# EAGLE board cetak (EAGLE 7.6.0)
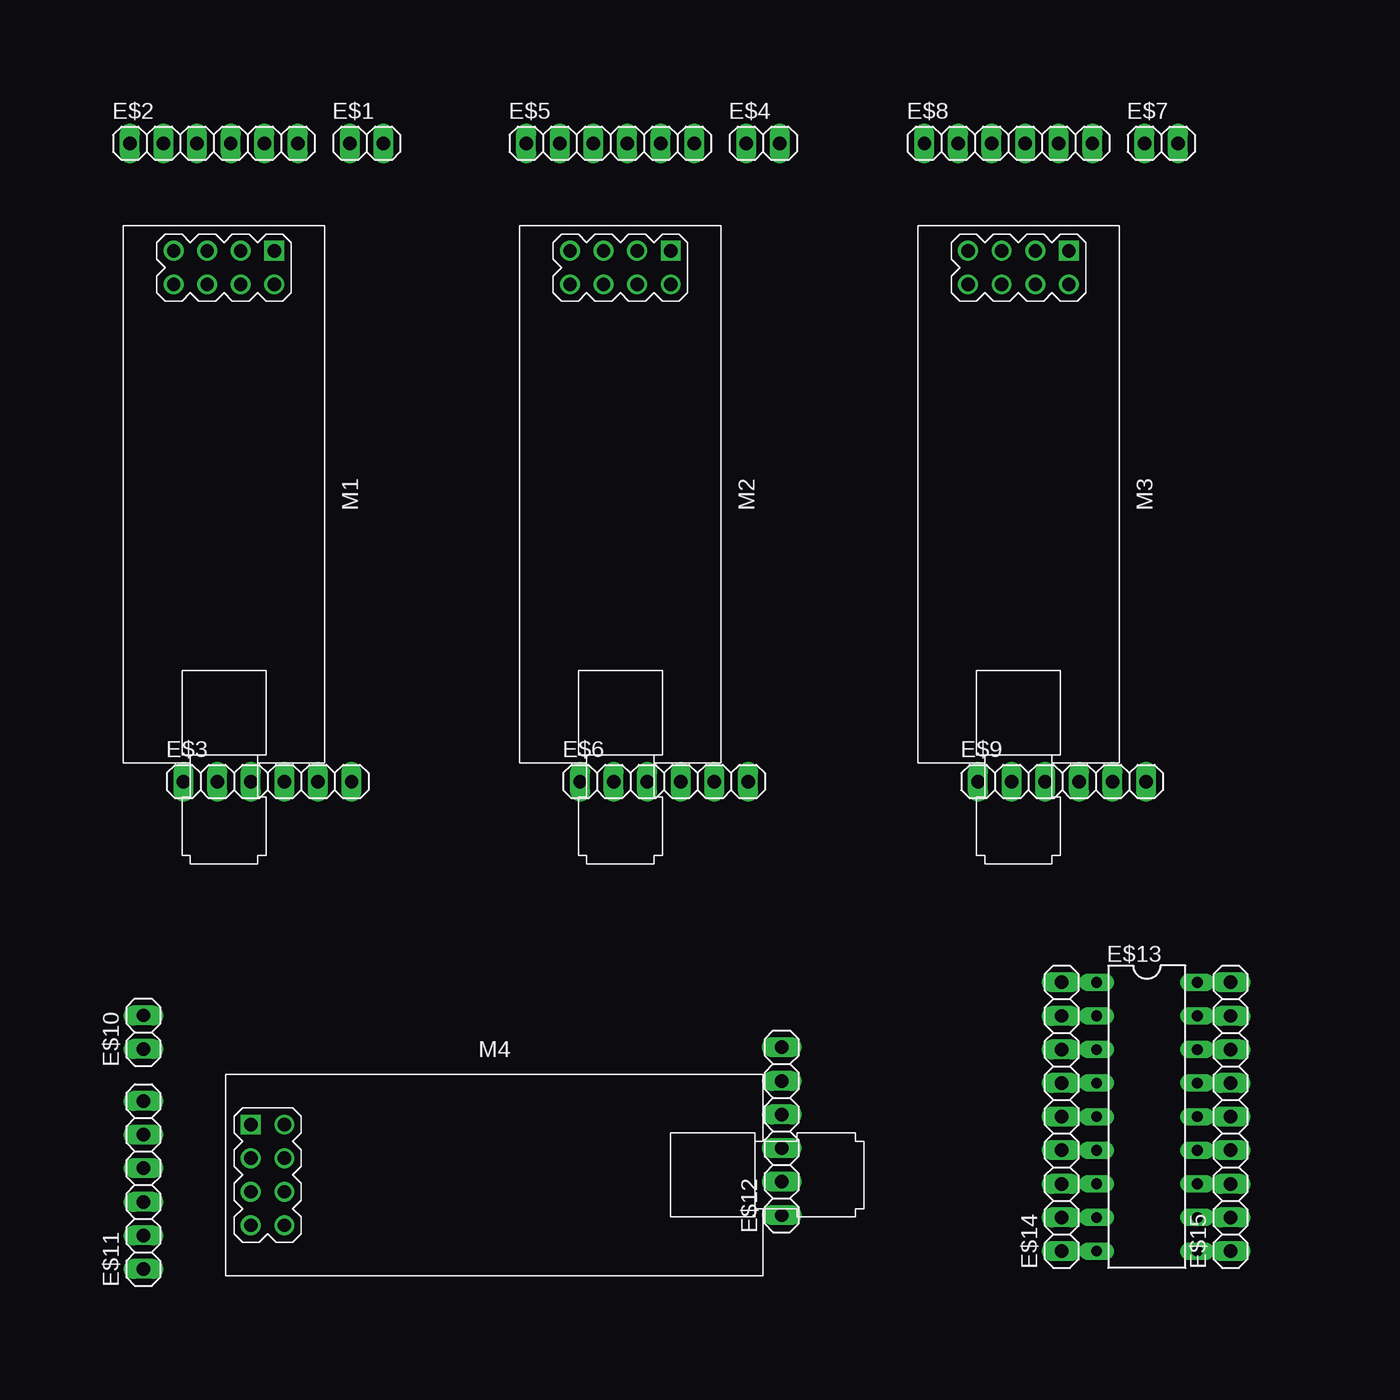
[diagram p0: board, top side]
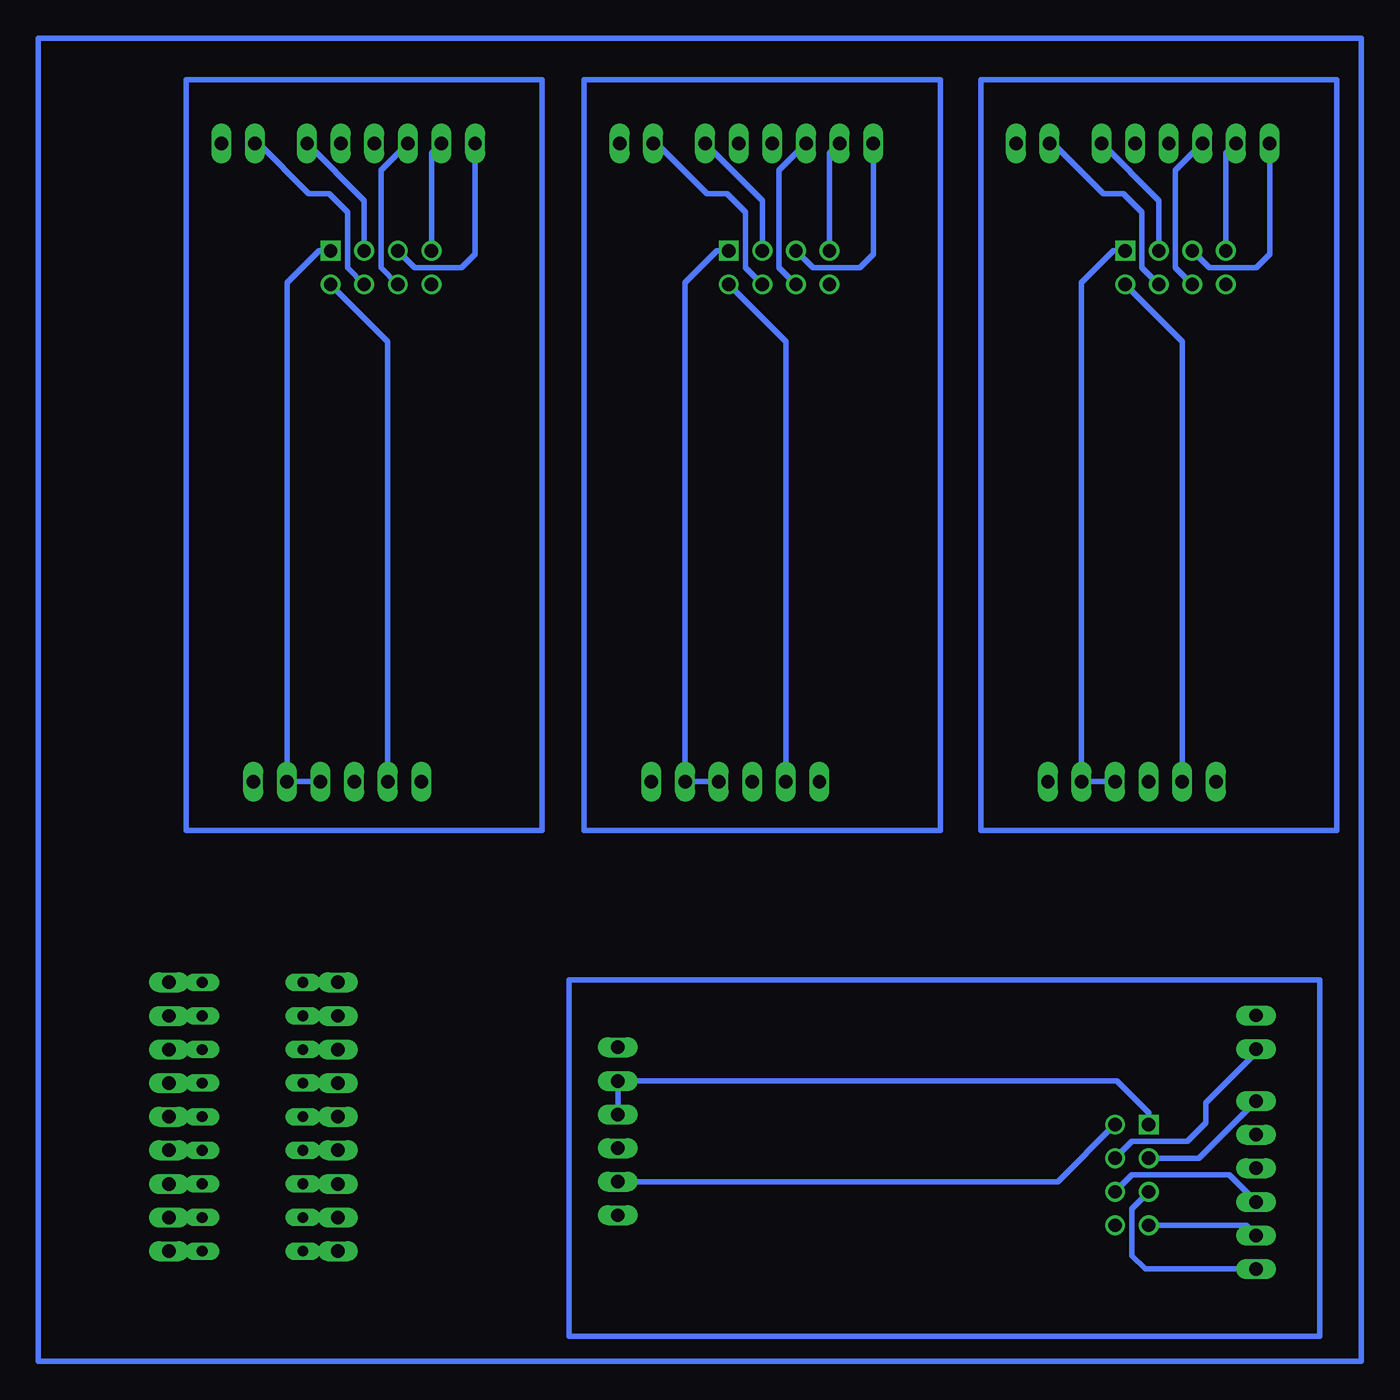
[diagram p1: board, bottom side, seen from below]

No outline drawn. Coordinates in mm, seen from the top.
Copper layers (1*16): Top 0.035mm / dielectric 1.5mm / Bottom 0.035mm
Design rules "default": minimum track width 10mil, minimum drill 24mil, track to track 8mil, track to pad 8mil, pad to pad 8mil, via to via 8mil, smd to smd 8mil, copper to edge 40mil, drill to drill 8mil, minimum pad ring 10mil, minimum via ring 8mil, stop-mask expansion 4mil, vias tented up to drill 0mil, thermal gap 10mil

## Footprints (pad centres in the part's own frame; a part is rotated, then mirrored left to right if it is on the bottom)
1X02 = drill 1.016 long: 1 -1.27,0; 2 1.27,0
1X06 = drill 1.016 long: 1 -6.35,0; 2 -3.81,0; 3 -1.27,0; 4 1.27,0; 5 3.81,0; 6 6.35,0
DIL18 = drill 0.813 long: 1 -10.16,-3.81; 2 -7.62,-3.81; 3 -5.08,-3.81; 4 -2.54,-3.81; 5 0,-3.81; 6 2.54,-3.81; 7 5.08,-3.81; 8 7.62,-3.81; 9 10.16,-3.81; 10 10.16,3.81; 11 7.62,3.81; 12 5.08,3.81; 13 2.54,3.81; 14 0,3.81; 15 -2.54,3.81; 16 -5.08,3.81; 17 -7.62,3.81; 18 -10.16,3.81
1X09 = drill 1.016 long: 1 -10.16,0; 2 -7.62,0; 3 -5.08,0; 4 -2.54,0; 5 0,0; 6 2.54,0; 7 5.08,0; 8 7.62,0; 9 10.16,0
WIRELESS-NRF24L01-PA-EXT = drill 1 square: 1 -18.415,3.81 | drill 1: 2 -15.875,3.81; 3 -18.415,1.27; 4 -15.875,1.27; 5 -18.415,-1.27; 6 -15.875,-1.27; 7 -18.415,-3.81; 8 -15.875,-3.81

## Placement (x,y rotation side)
E$1  [1X02]  114.82,42.07 0 top
E$2  [1X06]  103.26,42.07 0 top
E$3  [1X06]  107.33,-6.19 0 top
E$4  [1X02]  144.79,42.07 0 top
E$5  [1X06]  133.24,42.07 0 top
E$6  [1X06]  137.3,-6.19 0 top
E$7  [1X02]  174.89,42.07 0 top
E$8  [1X06]  163.34,42.07 0 top
E$9  [1X06]  167.4,-6.19 0 top
E$10  [1X02]  97.93,-25.14 90 top
E$11  [1X06]  97.93,-36.69 90 top
E$12  [1X06]  146.19,-32.63 90 top
E$13  [DIL18]  173.81,-31.52 270 top
E$14  [1X09]  167.37,-31.52 90 top
E$15  [1X09]  180.13,-31.52 90 top
M1  WIRELESS-NRF24L01-PA-EXT  [WIRELESS-NRF24L01-PA-EXT]  104.03,15.53 270 top
M2  WIRELESS-NRF24L01-PA-EXT  [WIRELESS-NRF24L01-PA-EXT]  134,15.53 270 top
M3  WIRELESS-NRF24L01-PA-EXT  [WIRELESS-NRF24L01-PA-EXT]  164.1,15.53 270 top
M4  WIRELESS-NRF24L01-PA-EXT  [WIRELESS-NRF24L01-PA-EXT]  124.47,-35.93 0 top

## Library data of the parts
E$1-E$12 E$14 E$15 = pinhead
E$13 = ic-package
M1-M4 = diy-modules

## Nets
1: M2.3
2: M2.4
3: M2.5
4: M2.6
5: M2.7
6: M3.3
7: M1.4
8: M1.3
9: M3.4
10: M3.5
11: M1.6
12: M1.7
13: M1.5
14: M3.6
15: M3.7
16: M4.3
17: M4.4
18: M4.5
19: M4.6
20: M4.7
+3V1: M2.2
+3V2: M3.2
+3V3: M1.2
+3V4: M4.2
AGND: M1.1
AGND1: M2.1
AGND2: M3.1
AGND3: M4.1

## Tracks (layer width: path | path; a pad name or v marks a point on that pad's centre or on a via)
1
  Bottom 0.406: M2.3 135.27,37.75 139.59,42.07
2
  Bottom 0.406: 143.52,42.07 143.27,42.07 139.46,38.26 137.94,38.26 136.54,36.86 136.54,32.67 M2.4
3
  Bottom 0.406: M2.5 131.46,32.67 127.9,32.67 126.89,33.69 126.89,42.07
4
  Bottom 0.406: M2.6 134,32.67 134,40.04 131.97,42.07
5
  Bottom 0.406: M2.7 130.19,41.31 129.43,42.07
6
  Bottom 0.406: M3.3 165.37,37.75 169.69,42.07
7
  Bottom 0.406: 113.55,42.07 113.3,42.07 109.49,38.26 107.96,38.26 106.57,36.86 106.57,32.67 M1.4
8
  Bottom 0.406: M1.3 105.3,37.75 109.61,42.07
9
  Bottom 0.406: 173.62,42.07 173.37,42.07 169.56,38.26 168.03,38.26 166.64,36.86 166.64,32.67 M3.4
10
  Bottom 0.406: M3.5 161.56,32.67 158,32.67 156.99,33.69 156.99,42.07
11
  Bottom 0.406: M1.6 104.03,32.67 104.03,40.04 101.99,42.07
12
  Bottom 0.406: M1.7 100.22,41.31 99.45,42.07
13
  Bottom 0.406: M1.5 101.49,32.67 97.93,32.67 96.91,33.69 96.91,42.07
14
  Bottom 0.406: M3.6 164.1,32.67 164.1,40.04 162.06,42.07
15
  Bottom 0.406: M3.7 160.29,41.31 159.53,42.07
16
  Bottom 0.406: M4.3 102.25,-34.66 97.93,-30.34
17
  Bottom 0.406: 97.93,-26.41 97.93,-26.66 101.74,-30.47 101.74,-31.99 103.14,-33.39 107.33,-33.39 M4.4
18
  Bottom 0.406: M4.5 107.33,-38.47 107.33,-42.03 106.31,-43.04 97.93,-43.04
19
  Bottom 0.406: M4.6 107.33,-35.93 99.96,-35.93 97.93,-37.96
20
  Bottom 0.406: M4.7 98.69,-39.74 97.93,-40.5
+3V1
  Bottom 0.406: 133.49,-6.19 133.49,27.08 M2.2
+3V2
  Bottom 0.406: 163.59,-6.19 163.59,27.08 M3.2
+3V3
  Bottom 0.406: 103.52,-6.19 103.52,27.08 M1.2
+3V4
  Bottom 0.406: 146.19,-36.44 112.92,-36.44 M4.2
AGND
  Bottom 0.406: M1.1 108.72,33.94 111.14,31.53 111.14,-6.19 108.6,-6.19
AGND1
  Bottom 0.406: M2.1 138.7,33.94 141.11,31.53 141.11,-6.19 138.57,-6.19
AGND2
  Bottom 0.406: M3.1 168.8,33.94 171.21,31.53 171.21,-6.19 168.67,-6.19
AGND3
  Bottom 0.406: M4.1 106.06,-31.23 108.47,-28.82 146.19,-28.82 146.19,-31.36
S$1
  Bottom 0.406: 91.83,46.9 118.76,46.9 118.76,-9.87 91.83,-9.87 91.83,46.9
S$2
  Bottom 0.406: 121.81,46.9 148.73,46.9 148.73,-9.87 121.81,-9.87 121.81,46.9
S$3
  Bottom 0.406: 151.91,46.9 178.83,46.9 178.83,-9.87 151.91,-9.87 151.91,46.9
S$4
  Bottom 0.406: 93.1,-48.12 93.1,-21.2 149.87,-21.2 149.87,-48.12 93.1,-48.12
S$6
  Bottom 0.406: 90,50 190,50 190,-50 90,-50 90,50